# EAGLE board 4_bit_asynchronous_down_counter (EAGLE 9.7.0)

Size 132.65 x 57.66 mm. Coordinates in mm from the lower left corner, seen from the top.
Outline: 0,0 132.65,0 132.65,57.66 0,57.66 0,0
Copper layers (1*16): Top 0.035mm / dielectric 1.5mm / Bottom 0.035mm
Design rules "default": minimum track width 6mil, minimum drill 0.35mm, track to track 6mil, track to pad 6mil, pad to pad 6mil, via to via 6mil, smd to smd 6mil, copper to edge 40mil, drill to drill 6mil, minimum pad ring 10mil, minimum via ring 8mil, stop-mask expansion 4mil, vias tented up to drill 0mil, thermal gap 10mil

## Footprints (pad centres in the part's own frame; a part is rotated, then mirrored left to right if it is on the bottom)
7SEG-13 = drill 0.813 long: 1 -5.08,-7.62; 2 -2.54,-7.62; 3 0,-7.62; 4 2.54,-7.62; 5 5.08,-7.62; 6 5.08,7.62; 7 2.54,7.62; 8 0,7.62; 9 -2.54,7.62; 10 -5.08,7.62
BATTERY-GENERIC = drill 1.118 pad 3.15 octagon: + 2.54,0; - -2.54,0
RESAD1016W63L850D250B = drill 0.83 pad 1.43: 1 -5.08,0; 2 5.08,0
SWITCH-MOMENTARY-PTH-6.5MM = drill 1.016 pad 1.88: 1 -3.251,2.261; 2 3.251,2.261; 3 -3.251,-2.261; 4 3.251,-2.261
DIP762W53P254L1969H508Q14B = drill 0.743 pad 1.343: 1 -3.81,7.62; 2 -3.81,5.08; 3 -3.81,2.54; 4 -3.81,0; 5 -3.81,-2.54; 6 -3.81,-5.08; 7 -3.81,-7.62; 8 3.81,-7.62; 9 3.81,-5.08; 10 3.81,-2.54; 11 3.81,0; 12 3.81,2.54; 13 3.81,5.08; 14 3.81,7.62
DIP762W53P254L1969H508Q16B = drill 0.743 pad 1.343: 1 -3.81,8.89; 2 -3.81,6.35; 3 -3.81,3.81; 4 -3.81,1.27; 5 -3.81,-1.27; 6 -3.81,-3.81; 7 -3.81,-6.35; 8 -3.81,-8.89; 9 3.81,-8.89; 10 3.81,-6.35; 11 3.81,-3.81; 12 3.81,-1.27; 13 3.81,1.27; 14 3.81,3.81; 15 3.81,6.35; 16 3.81,8.89

## Placement (x,y rotation side)
DIGIT1  7SEG-CK  [7SEG-13]  114.94,14.1 0 top
P1  BATTERYGENERIC  [BATTERY-GENERIC]  124.4,49.4 180 top
R1  1k  [RESAD1016W63L850D250B]  114.94,26.8 90 top
S1  SWITCH_MOMENTARY  [SWITCH-MOMENTARY-PTH-6.5MM]  8.26,12.83 90 top
U1  74HC74_PDIP  [DIP762W53P254L1969H508Q14B]  36.2,12.83 90 top
U2  74HC74_PDIP  [DIP762W53P254L1969H508Q14B]  59.05,12.83 90 top
U3  CD4511_PDIP  [DIP762W53P254L1969H508Q16B]  90.81,12.83 90 top

## Library data of the parts
DIGIT1 = Tinkercad; CATEGORY: Opto-Electronic; SUB-CATEGORY: Display; TYPE: 7-Segment
P1 R1 S1 U1-U3 = Tinkercad

## Nets
DIGIT1_CK2: DIGIT1.8 R1.1
P1+: P1.+ S1.1 S1.2 U1.1 U1.4 U1.10 U1.13 U1.14 U2.1 U2.4 U2.10 U2.13 U2.14 U3.3 U3.4 U3.16
P1-: P1.- R1.2 U1.7 U2.7 U3.5 U3.8
U1_1!Q: U1.2 U1.6
U1_1Q: U1.5 U2.11 U3.1
U1_2Q: U1.3 U1.9 U3.7
U1_CLK2: S1.3 S1.4 U1.11
U1_D2: U1.8 U1.12
U2_1!Q: U2.2 U2.6
U2_1Q: U2.5 U3.6
U2_2Q: U2.3 U2.9 U3.2
U2_D2: U2.8 U2.12
U3_A: DIGIT1.7 U3.13
U3_B: DIGIT1.6 U3.12
U3_C: DIGIT1.4 U3.11
U3_D: DIGIT1.2 U3.10
U3_E: DIGIT1.1 U3.9
U3_F: DIGIT1.9 U3.15
U3_G: DIGIT1.10 U3.14

## Tracks (layer width: path | path; a pad name or v marks a point on that pad's centre or on a via)
DIGIT1_CK2  (1 unrouted)
P1+  (15 unrouted)
P1-  (5 unrouted)
U1_1!Q  (1 unrouted)
U1_1Q  (2 unrouted)
U1_2Q  (2 unrouted)
U1_CLK2  (2 unrouted)
U1_D2  (1 unrouted)
U2_1!Q  (1 unrouted)
U2_1Q  (1 unrouted)
U2_2Q  (2 unrouted)
U2_D2  (1 unrouted)
U3_A  (1 unrouted)
U3_B  (1 unrouted)
U3_C  (1 unrouted)
U3_D  (1 unrouted)
U3_E  (1 unrouted)
U3_F  (1 unrouted)
U3_G  (1 unrouted)